# Altium PCB PCB1.PcbDoc
Units mil, origin at the board's own origin, x right, y up, seen from the top; angles counter-clockwise.
Board outline 4645 x 4275 mil, 2 copper layers (Top Layer, Bottom Layer); 58 components, 80 nets, 257 pads, 125 vias.
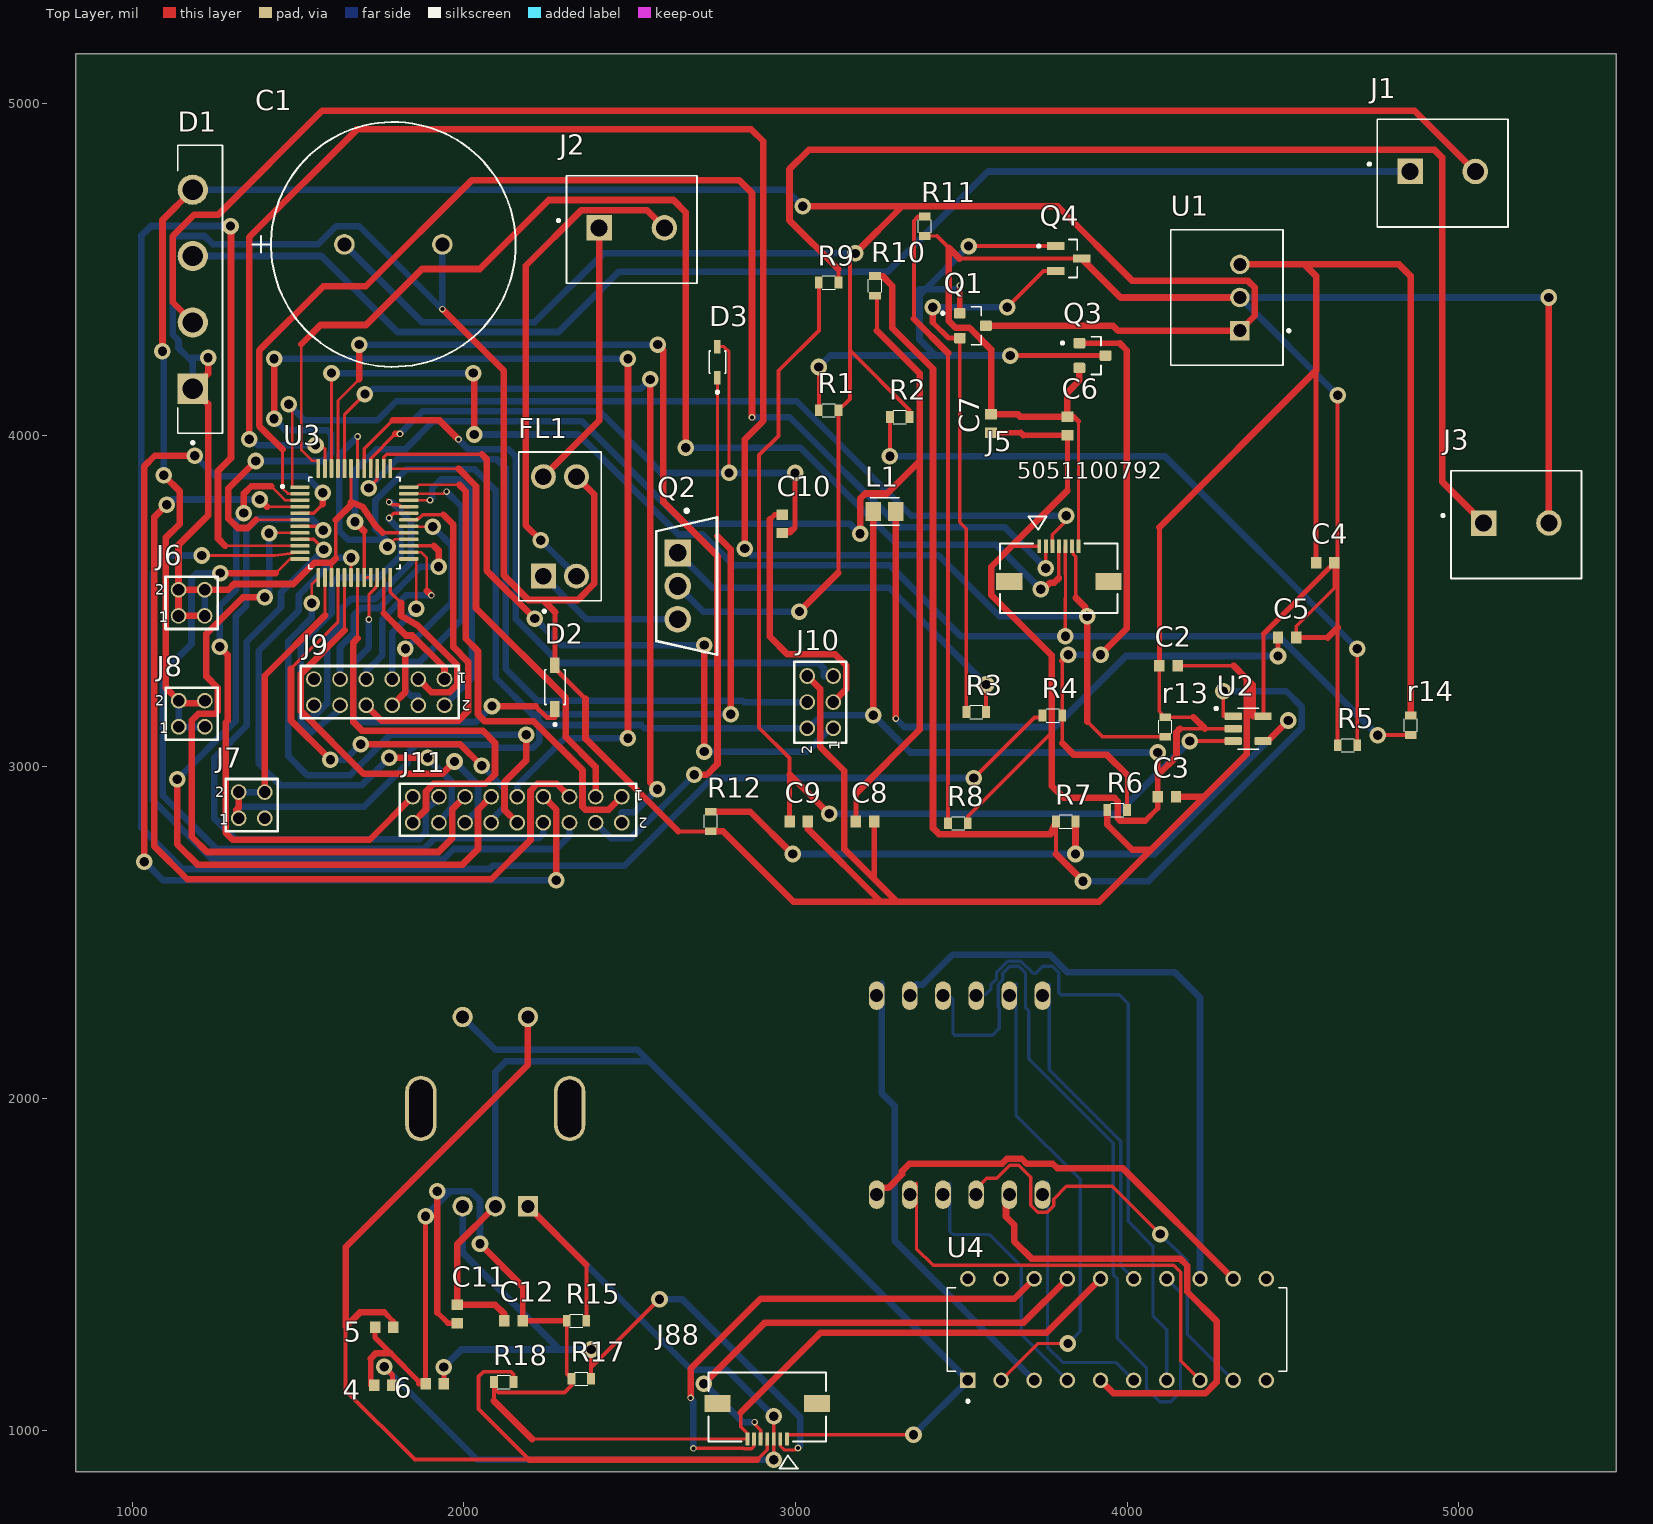
[diagram p0: Top Layer view]
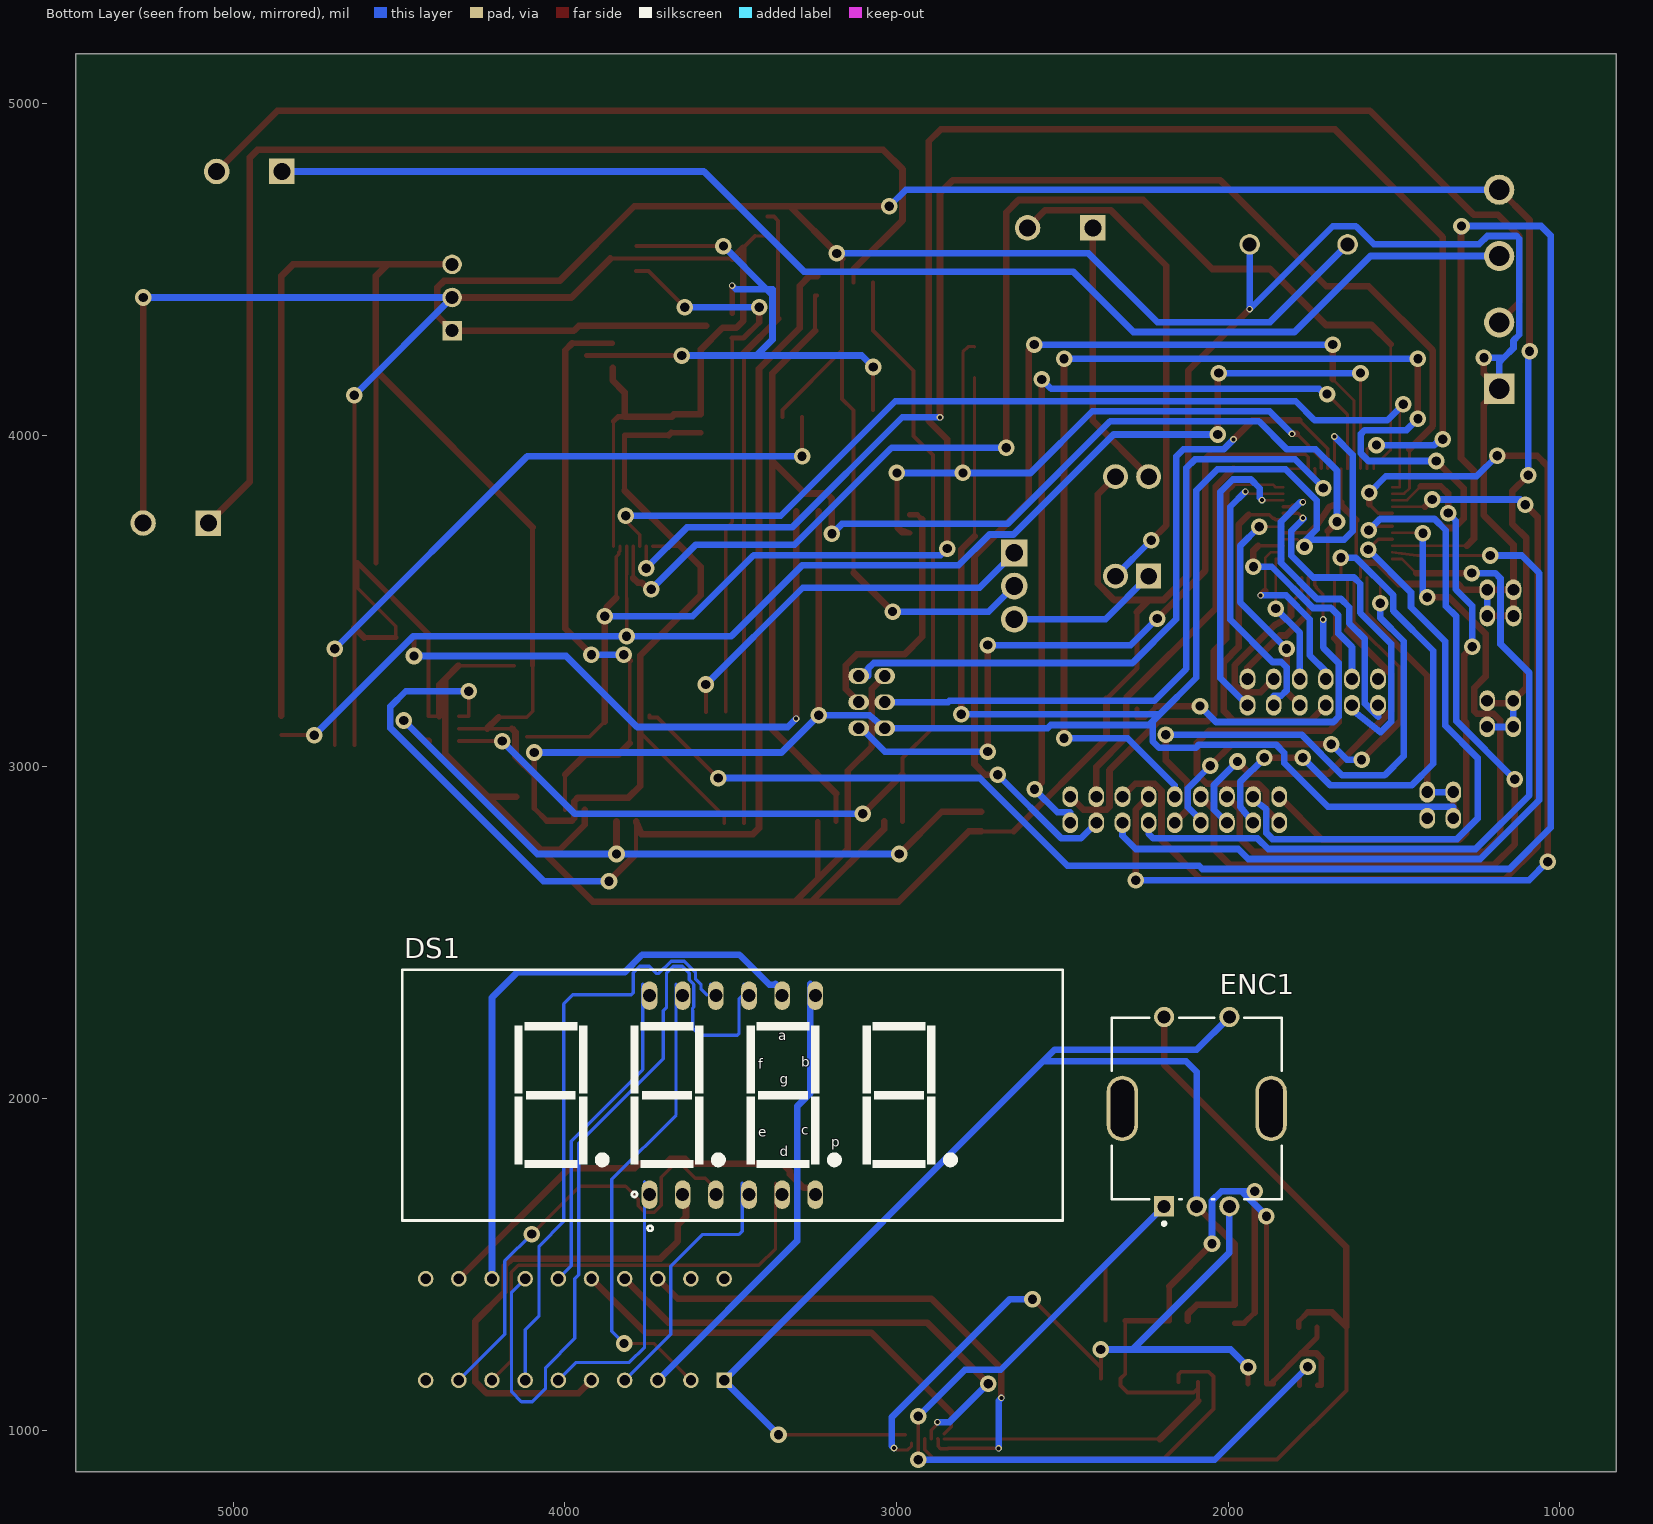
[diagram p1: Bottom Layer view, seen from below]

## Layer stack, top to bottom
Top Solder: solder mask 0.4, Solder Resist, Dk 3.5
Top Layer: signal copper 1.4
Dielectric 1: dielectric 12.6, FR-4, Dk 4.8
Bottom Layer: signal copper 1.4
Bottom Solder: solder mask 0.4, Solder Resist, Dk 3.5

## Board outline
830,875 5475,875 5475,5150 830,5150

## Design rules (kind name [scope] priority, off if disabled: settings)
Clearance [All] p1: gap=5 ignorepadtopadclearanceinfootprint=FALSE
Height [All] p1: minheight=0 maxheight=10000 prefheight=500
HoleSize [All] p1: absolutevalues=TRUE maxlimit=1000 minlimit=1 maxpercent=80.000 minpercent=20.000
MinimumSolderMaskSliver [All] p1: minsoldermaskwidth=0
PolygonConnect [All] p1: connectstyle=Relief reliefconductorwidth=10 reliefentries=4 polygonreliefangle="90 Angle" airgapwidth=10
RoutingVias [All] p1: holewidth=28 width=50 viastyle="Through Hole" minholewidth=28 minwidth=50 maxholewidth=28 maxwidth=50
SMDNeckDown [All] p1: percent=100.000
SilkToSilkClearance [All] p1: silktosilkclearance=0
SilkToSolderMaskClearance [IsPad] p1: minsilkscreentomaskgap=0 clearancetoexposedcopper=TRUE
SolderMaskExpansion [All] p1: expansion=4 istentingtop=FALSE
Width [All] p1: maxlimit=25 minlimit=8 preferedwidth=20 minimp=50.000000 maximp=50.000000 favimp=50.000000
25 further rules are at their usual default settings.

## Classes and differential pairs
component class soldererboutdisplay: 4 5 6 C11 C12 DS1 ENC1 J88 R15 R17 R18 U4
component class soldeerboutmainbody2: C10 D3 J2 J3 J5 J6 J7 J8 J9 J10 J11 r13 r14
component class soldeerboutmainbody1: C1 C2 C3 C4 C5 C6 C7 C8 C9 D1 D2 FL1 J1 L1 Q1 Q2 Q3 Q4 R1 R2 R3 R4 R5 R6 R7 R8 R9 R10 R11 R12 U1 U2 U3

## Components (designator, comment, footprint, x,y, rotation, side; value= is the part's Value field where it differs from the comment)
4 "10N" "C 0603 / 1608" 1757.44,1135 r180 top
5 "10N" "C 0603 / 1608" 1760,1310 r180 top
6 "10N" "C 0603 / 1608" 1912.44,1140 r180 top
C1 "50PK4700MEFC18X40" CAP_PKPZ_18X40_RUB 1640,4575 r0 top
C2 "100n" "C 0603 / 1608" 4125,3305 r0 top
C3 "10u" "C 0603 / 1608" 4120,2910 r0 top
C4 "100N" "C 0603 / 1608" 4597.56,3615 r0 top
C5 "100N" "C 0603 / 1608" 4482.56,3390 r0 top
C6 "D805" "C 0603 / 1608" 3820,4027.56 r90 top
C7 "10U" "C 0603 / 1608" 3590,4035 r90 top
C8 "10N" "C 0603 / 1608" 3210,2835 r0 top
C9 "10N" "C 0603 / 1608" 3010,2835 r0 top
C10 "100n" "C 0603 / 1608" 2960,3732.56 r90 top
C11 "10u" "C 0603 / 1608" 1980,1350 r90 top
C12 "100n" "C 0603 / 1608" 2150,1330 r180 top
D1 "GBU1003" SIP343W114P508L2205H2134Q4 1205,4440 r90 top
D2 "5v1" SOD3715X135N 2275,3240 r90 top
D3 "1N4148WX-TP" SOD2512X115N 2765,4220 r90 top
DS1 "7SEG_4DIGIT_CC" 7SEGX4_12 3495,2010 r180 bottom
ENC1 "PEC11R-4215K-S0024" FP-PEC11R-4215K-S0024-MFG 2095,1970 r180 bottom
FL1 "CM2545X171B-10" XFMR_CM2545X171B-10 2290,3725 r90 top
J1 "1935161" PHOENIX_1935161 4825,4895 r0 top
J2 "1935161" PHOENIX_1935161 2380,4725 r0 top
J3 "1935161" PHOENIX_1935161 5046.85,3835 r0 top
J5 "5051100792" CON_5051100792_MOL 3794.37,3568.54 r0 top
J6 "GND" HDR2_M_2X2 1179.37,3494.37 r0 top value=HDRM_2X2
J7 "5V" HDR2_M_2X2 1360.63,2884.37 r0 top value=HDRM_2X2
J8 "24V" HDR2_M_2X2 1180,3160 r0 top value=HDRM_2X2
J9 "GPIO2" HDR2_M_2X6 1745,3225 r180 top value=HDRM_2X6
J10 "HDRM_2X3" HDR2_M_2X3 3075,3195 r90 top
J11 "GPIO1" HDR2_M_2X9 2121.89,2870.63 r180 top value=HDRM_2X9
J88 "5051100792" CON_5051100792_MOL 2915,1070 r180 top
L1 "10U" INDC2012X145N 3268.86,3770 r0 top
Q1 "BC847B" TRANS_BC847B 3535,4330 r0 top
Q2 "IRF9530PBF" FP-X15-0364-MFG 2671.97,3545 r0 top
Q3 "BC847B" TRANS_BC847B 3895.63,4240 r0 top
Q4 "BC857B" SOT95P240X120-3N 3823.98,4532.6 r0 top
R1 "4K7" "R 0603" 3100,4075 r0 top
R2 "68k" "R 0603" 3314.53,4055 r0 top
R3 "100" "R 0603" 3545,3165 r0 top
R4 "10K" "R 0603" 3775,3155 r0 top
R5 "10k" "R 0603" 4664.53,3065 r0 top
R6 "4k7" "R 0603" 3970,2870 r0 top
R7 "18k" "R 0603" 3815,2835 r0 top
R8 "1M" "R 0603" 3490,2830 r0 top
R9 "5K6" "R 0603" 3100,4460 r0 top
R10 "5k6" "R 0603" 3240,4450 r90 top
R11 "10M" "R 0603" 3390,4630 r90 top
R12 "100" "R 0603" 2745,2835 r90 top
r13 "4k7" "R 0603" 4115,3120 r90 top (schematic designator R13)
r14 "4k7" "R 0603" 4855,3125 r90 top (schematic designator R14)
R15 "10k" "R 0603" 2340,1330 r180 top
R17 "10K" "R 0603" 2354.53,1155 r180 top
R18 "10k" "R 0603" 2120.47,1145 r180 top
U1 "OKI-78SR-5/1.5-W36-C" CONV_OKI-78SR-5/1.5-W36-C 4340,4415 r90 top
U2 "MCP6001RT-I/OT" SOT95P280X145-5N 4365,3115 r0 top
U3 "ATMEGA4809-AFR" QFP50P900X900X120-48N 1670,3735 r0 top
U4 "TM1637" DIP778W43P254L2612H431Q20N 3970,1303.15 r90 top

## Footprints (in the part's own frame and the unit in brackets; to place one, negate y for a bottom-side part, rotate by r counter-clockwise, add the part's x,y. Pads: shape width x height; smd on the part's side, far side on the other; paste and mask are expansions set on the pad)
7SEGX4_12 [mm] "7SEG 4DIGIT 12pin Pitch: 2.54mm    5641 0.56\", 19X50.3mm"
  oval 1.2x2.2 hole 1: 1(-6.35,-7.62) 2(-3.81,-7.62) 3(-1.27,-7.62) 4(1.27,-7.62) 5(3.81,-7.62) 6(6.35,-7.62) 7(6.35,7.62) 8(3.81,7.62) 9(1.27,7.62) 10(-1.27,7.62) 11(-3.81,7.62) 12(-6.35,7.62)
  silkscreen extent -25.3,-10.4 25.3,9.6, body extent -25.2,-9.5 25.2,9.5, height 8
"C 0603 / 1608" [mm] "Capacitor 0603 / 1608 (1.6 x 0.8 mm)"
  rect 0.8x0.9 smd: 1(-0.7,0) 2(0.7,0)
  body extent -0.8,-0.4 0.8,0.4, height 0.3
CAP_PKPZ_18X40_RUB [mil]
  round 62 / inner round 60 / far side round 62 hole 42 paste-99999 mask+0: 1(0,0) 2(295.28,0)
  silkscreen extent -276,-369 517,369, body extent -216,-364 512,364, height 1655
CON_5051100792_MOL [mm]
  rect 0.3x1 smd paste+0 mask+0.025: 1(-1.5,2.45) 2(-1,2.45) 3(-0.5,2.45) 4(0,2.45) 5(0.5,2.45) 6(1,2.45) 7(1.5,2.45)
  rect 2x1.3 smd paste+0 mask+0.025: P1(-3.8,-0.25) P2(3.8,-0.25)
  silkscreen extent -4.5,-2.65 4.5,4.74
CONV_OKI-78SR-5/1.5-W36-C [mm]
  rect 1.5x1.5 hole 1: 1(-2.54,0)
  round 1.5 hole 1: 2(0,0) 3(2.54,0)
  silkscreen extent -5.2,-3.85 5.2,5.3, body extent -5.21,-3.3 5.21,5.33, height 16.51
DIP778W43P254L2612H431Q20N [mm]
  rect 1.19x1.19 hole 0.79: 1(-3.89,11.43)
  round 1.19 hole 0.79: 2(-3.89,8.89) 3(-3.89,6.35) 4(-3.89,3.81) 5(-3.89,1.27) 6(-3.89,-1.27) 7(-3.89,-3.81) 8(-3.89,-6.35) 9(-3.89,-8.89) 10(-3.89,-11.43) 11(3.89,-11.43) 12(3.89,-8.89) 13(3.89,-6.35) 14(3.89,-3.81) 15(3.89,-1.27) 16(3.89,1.27) 17(3.89,3.81) 18(3.89,6.35) 19(3.89,8.89) 20(3.89,11.43)
  silkscreen extent -5.58,-13 3.2,13, body extent -4.03,-13 4.03,13, height 4.31
FP-PEC11R-4215K-S0024-MFG [mm]
  round 1.55 hole 1 paste-2539.97 mask+0: 1(-2.5,7) 2(2.5,7) B(2.5,-7.5) C(0,-7.5)
  rrect100% 2.4x5 hole 4.4 slot 1.8 at 0 deg paste-2539.97 mask+0: 3(-5.7,0) 4(5.7,0)
  rect 1.55x1.55 hole 1 paste-2539.97 mask+0: A(-2.5,-7.5)
  silkscreen extent -6.5,-8.95 6.5,6.95, body extent -7,-7.7 7,7.2, height 22.3
FP-X15-0364-MFG [mm]
  rect 2.05x2.05 hole 1.35 paste-2539.97 mask+0: 1(-0.685,2.54)
  round 2.05 hole 1.35 paste-2539.97 mask+0: 2(-0.685,0) 3(-0.685,-2.54)
  silkscreen extent -2.32,-5.26 2.33,5.88, body extent -2.42,-5.36 2.42,5.36, height 0.25
HDR2_M_2X2 [mm] "Connector; Header; 2mm Pitch"
  round 1.2 / inner round 1.2 / far side oval 1.2x1.6 hole 0.9: 1(-1,-1) 2(-1,1) 3(1,-1) 4(1,1)
  silkscreen extent -2,-2 2,2, body extent -1.95,-2 1.95,2, height 6
HDR2_M_2X3 [mm] "Connector; Header; 2mm Pitch"
  round 1.2 / inner round 1.2 / far side oval 1.2x1.6 hole 0.9: 1(-2,-1) 2(-2,1) 3(0,-1) 4(0,1) 5(2,-1) 6(2,1)
  silkscreen extent -3.1,-2 3.1,2, body extent -2.95,-2 2.95,2, height 6
HDR2_M_2X6 [mm] "Connector; Header; 2mm Pitch"
  round 1.2 / inner round 1.2 / far side oval 1.2x1.6 hole 0.9: 1(-5,-1) 2(-5,1) 3(-3,-1) 4(-3,1) 5(-1,-1) 6(-1,1) 7(1,-1) 8(1,1) 9(3,-1) 10(3,1) 11(5,-1) 12(5,1)
  silkscreen extent -6.1,-2 6,2, body extent -5.95,-2 5.95,2, height 6
HDR2_M_2X9 [mm] "Connector; Header; 2mm Pitch"
  round 1.2 / inner round 1.2 / far side oval 1.2x1.6 hole 0.9: 1(-9,-1) 2(-9,1) 3(-7,-1) 4(-7,1) 5(-5,-1) 6(-5,1) 7(-3,-1) 8(-3,1) 9(-1,-1) 10(-1,1) 11(1,-1) 12(1,1) 13(3,-1) 14(3,1) 15(5,-1) 16(5,1) 17(7,-1) 18(7,1)
  silkscreen extent -10.1,-2 8,2, body extent -9.95,-2 7.95,2, height 6
INDC2012X145N [mm]
  rect 1.2x1.47 smd: 1(-0.86,0) 2(0.86,0)
  silkscreen extent -1.1,-1.06 1.1,1.06, body extent -1,-0.63 1,0.63, height 1.45
PHOENIX_1935161 [mm]
  rect 1.95x1.95 hole 1.3: 1(0.715,-2.54)
  round 1.95 hole 1.3: 2(5.715,-2.54)
  silkscreen extent -2.5,-6.79 8.22,1.46, body extent -1.99,-7.12 8.41,1.88, height 5.7
QFP50P900X900X120-48N [mm]
  rrect50% 1.47x0.28 smd: 1(-4.17,2.75) 2(-4.17,2.25) 3(-4.17,1.75) 4(-4.17,1.25) 5(-4.17,0.75) 6(-4.17,0.25) 7(-4.17,-0.25) 8(-4.17,-0.75) 9(-4.17,-1.25) 10(-4.17,-1.75) 11(-4.17,-2.25) 12(-4.17,-2.75) 25(4.17,-2.75) 26(4.17,-2.25) 27(4.17,-1.75) 28(4.17,-1.25) 29(4.17,-0.75) 30(4.17,-0.25) 31(4.17,0.25) 32(4.17,0.75) 33(4.17,1.25) 34(4.17,1.75) 35(4.17,2.25) 36(4.17,2.75)
  rrect50% 0.28x1.47 smd: 13(-2.75,-4.17) 14(-2.25,-4.17) 15(-1.75,-4.17) 16(-1.25,-4.17) 17(-0.75,-4.17) 18(-0.25,-4.17) 19(0.25,-4.17) 20(0.75,-4.17) 21(1.25,-4.17) 22(1.75,-4.17) 23(2.25,-4.17) 24(2.75,-4.17) 37(2.75,4.17) 38(2.25,4.17) 39(1.75,4.17) 40(1.25,4.17) 41(0.75,4.17) 42(0.25,4.17) 43(-0.25,4.17) 44(-0.75,4.17) 45(-1.25,4.17) 46(-1.75,4.17) 47(-2.25,4.17) 48(-2.75,4.17)
  silkscreen extent -5.6,-3.5 3.5,3.5, body extent -4.5,-4.5 4.5,4.5, height 1.2
"R 0603" [mm]
  rect 0.6x0.9 smd mask+0.01: 1(-0.75,0) 2(0.75,0)
  silkscreen extent -0.48,-0.51 0.51,0.51, body extent -0.82,-0.4 0.88,0.4, height 0.56
SIP343W114P508L2205H2134Q4 [mm]
  round 2.31 hole 1.54: AC1(-2.54,0.56) AC2(2.54,0.56) NEG(7.62,0.56)
  rect 2.31x2.31 hole 1.54: POS(-7.62,0.56)
  silkscreen extent -11.86,-1.71 11.03,1.72, body extent -11.02,-1.72 11.02,1.72, height 21.34
SOD2512X115N [mm]
  rect 1.05x0.5 smd: A(1.185,0) C(-1.185,0)
  silkscreen extent -2.4,-0.62 0.85,0.62
SOD3715X135N [mm]
  rect 1.21x0.73 smd: A(1.68,0) K(-1.68,0)
  silkscreen extent -2.95,-0.78 1.33,0.78, body extent -1.83,-0.77 1.83,0.77, height 0.74
SOT95P240X120-3N [mm]
  rect 1.34x0.6 smd: 1(-0.99,0.95) 2(-0.98,-0.95) 3(0.99,0)
  silkscreen extent -2.39,-1.45 0.65,1.45, body extent 0,-1.2 3.04,0.1, height 2
SOT95P280X145-5N [mm]
  rrect25% 1.32x0.59 smd: 1(-1.145,0.95) 2(-1.145,0) 3(-1.145,-0.95) 4(1.145,-0.95) 5(1.145,0.95)
  silkscreen extent -2.54,-1.56 0.8,1.64, body extent -1.45,-1.35 1.45,1.35, height 1.45
TRANS_BC847B [mm]
  rrect25% 0.9x0.8 smd: 1(-1,0.95) 2(-1,-0.95) 3(1,0)
  silkscreen extent -2.4,-1.45 0.65,1.45, body extent -1.25,-1.45 1.25,1.45, height 1.1
XFMR_CM2545X171B-10 [mil]
  rect 75x75 hole 50: 1(-150,50)
  round 75 hole 50: 2(-150,-50) 3(150,-50) 4(150,50)
  silkscreen extent -260,-124 224,124, body extent -224,-124 224,124, height 374

## Part data
4 5 6 C2 C3 C4 C5 C6 C7 C8 C9 C10 C11 C12: library part Capacitor
C1: "No Description Available", Mfr_Name=Rubycon
D1 D3 FL1 J1 J2 J3 Q4: Package=None, Availability=Unavailable, Price=None
  D1: MF="{'manufacturer': u'Taiwan Semiconductor'}", MP=GBU1003
  D3: MF="{'manufacturer': u'Micro Commercial'}", MP=1N4148WX-TP
  FL1: MF="{'manufacturer': u'Laird'}", MP=CM2545X171B-10
  J1 J2 J3: MF="{'manufacturer': u'Phoenix Contact'}", MP=1935161
  Q4: MF="{'manufacturer': u'Diotec'}", MP=BC857B
D2: library part MMSZ5231B-7-F, Package=None, Availability=Unavailable, MF="{'manufacturer': u'Diodes Inc.'}", MP=MMSZ5231B-7-F, Price=None
DS1: "7SEGMENT, 4DIGIT, common cathode 5641", MANF_P#=DPY-4CK
ENC1: library part pec11r425fs0024, "ROTARY ENCODER MECHANICAL 24PPR", Max Operating Temperature=70°C, Max Supply Voltage (DC)=5V, Min Operating Temperature=-30°C, Package Quantity=150, Built in Switch=Yes, Detent=Yes, Encoder Type=Mechanical, Height=13.4mm, Hole Diameter=1.8mm, Length=21.5mm, Mount="Through Hole", Number of Channels=2, Orientation=Vertical, Output Type=Quadrature, Packaging=Bulk, Pulses per Revolution=24, REACH SVHC="No SVHC", RoHS Compliant=Yes, Series=PEC11R, Termination="PC Pin", Width=12.5mm
J5 J88: "No Description Available", Mfr_Name="Molex Connector Corporation", RefDes=RefDes, Type=Type
J6 J7 J8: library part HDRRS_M_2X2, "CONN, HEADER, Male, pitch: 2.54mm, 4POS", MANF=MANF, MANF_P#=MANF_PART#
J9: library part HDRRS_M_2X6, "CONN, HEADER, Male, pitch: 2.54mm, 12POS"
J10: library part HDRRS_M_2X3, "CONN, HEADER, Male, pitch: 2.54mm, 6POS", MANF=MANF, MANF_P#=MANF_PART#
J11: library part HDRRS_M_2X9, "CONN, HEADER, Male, pitch: 2.54mm, 18POS"
L1: library part MLZ2012N100LT000, "Inductor Power Shielded Multi-Layer 10uH 20% 2MHz Ferrite 500mA 390mOhm DCR 0805 T/R", Package=None, Availability=Unavailable, MF="{'manufacturer': u'TDK'}", MP=MLZ2012N100LT000, Price=None
Q1 Q3: "<a href=\"https://pricing.snapeda.com/parts/BC847B/Diotec%20Semiconductor/view-part?ref=eda\">Check availability</a>", Package=None, Availability=Unavailable, MF="{'manufacturer': u'STMicroelectronics'}", MP=BC847B, Price=None
Q2: library part CMP-02550-000233-1, "MOSFET P-CH 100V 12A TO-220AB", Case/Package=TO-220AB, Continuous Drain Current (ID)=12A, Current Rating=-12A, Drain to Source Breakdown Voltage=-100V, Drain to Source Resistance=300mR, Drain to Source Voltage (Vdss)=100V, Gate to Source Voltage (Vgs)=20V, Input Capacitance=860pF, Max Operating Temperature=175°C, Max Power Dissipation=88W, Min Operating Temperature=-55°C, Package Quantity=50, Threshold Voltage=-4V, Drain-source On Resistance-Max=300mR, Element Configuration=Single, Fall Time=39ns, Height=9.01mm, Lead Free="Lead Free", Length=10.41mm, Mount="Through Hole", Number of Channels=1, Number of Elements=1, Number of Pins=3, On-State Resistance=300mR, Packaging=Rail/Tube, Polarity=P-CHANNEL, Polarization=P, Power Dissipation=88W, Radiation Hardening=No, Rds On Max=300mR, Recovery Time=240ns, Rise Time=52ns, RoHS Compliant=Yes, Series=-, Turn-Off Delay Time=31ns, Turn-On Delay Time=12ns, Voltage Rating (DC)=-100V, Weight=0.211644oz, Width=4.7mm
R1 R2 R3 R4 R5 R6 R7 R8 R9 R10 R11 R12 r13 r14 R15 R17 R18: library part Resistor
U1: "OKI Series 8 W Single Output 5 V Non Isolated Through Hole DC/DC Converter", Package=None, Availability=Unavailable, MF="{'manufacturer': u'Murata Power Solutions'}", MP=OKI-78SR-5/1.5-W36-C, Price=None
U2: "General Purpose Amplifier 1 Circuit Rail-to-Rail SOT-23-5", Package=None, Availability=Unavailable, MF="{'manufacturer': u'Microchip Technology'}", MP=MCP6001RT-I/OT, Price=None
U3: "20MHz 48KB TQFP48 Ind 125C Green T&R", Package=None, Availability=Unavailable, MF="{'manufacturer': u'Microchip'}", MP=ATMEGA4809-AFR, Price=None
U4: "LED Drive Control Special Circuit", Package=Package, Availability="Not in stock", Check_prices=https://www.snapeda.com/parts/TM1637/Titan+Micro+Electronics/view-part/?ref=eda, MF="Titan Micro Electronics", MP=TM1637, Price=None, SnapEDA_Link=https://www.snapeda.com/parts/TM1637/Titan+Micro+Electronics/view-part/?ref=snap

## Via types
v1: diameter 50, hole 28, Top Layer to Bottom Layer, 108 vias
v2: diameter 20, hole 12, Top Layer to Bottom Layer, 17 vias

## Nets (pads, with @x,y where several pads share a name; then routed paths per layer and width w, separated by ;. In a path a pad name is that pad's centre, name@x,y a point inside that pad or via, vN(x,y) a via of type N, cw(c..) or ccw(c..) an arc to the next point about the centre after c; other vN are vias at no path point)
5V: C2.1 C3.1 C4.1 C6.1 C7.1 D3.C J5.1 J7.1 J7.2 J7.3 J7.4 J10.2 L1.1 R8.2 r13.2 r14.2 U1.3 U2.2 U3.14 U3.28 U3.42 | length 15142.1
  Top Layer w8: 1581.42,3456 U3.14 ; v1(1770,3664) 1791.79,3685.79 U3.28
  Top Layer w9.84: 2765,3695 D3.C
  Top Layer w10: U3.42 v2(1679.84,3995.84) ; 3652,3665 J5.1 ; C2.1 4097.44,3167.09 r13.2 4200,3149.53 ; 4160,3115 4234.53,3115 U2.2
  Top Layer w11.81: R8.2 3519.53,2850 3773,3103.47
  Top Layer w15.75: C7.1 3679.56,4007.44 ; 3687,4000 C6.1 3820,3833 ; 4054.44,2837 4092.44,2875 C3.1 4092.44,2974.44 v1(4092.44,3043) ; C2.1 4097.44,3722.44 ; C4.1 4570,4195
  Top Layer w20: J7.1 1314.36,2851.9 1314.36,2870.26 1321.26,2877.16 J7.2 ; J7.4 1400,3274.58 1581.42,3456 ; 2765,3695 2805,3655 v1(2805,3158) ; v1(3235,3155) L1.1 ; 3679.56,4007.44 3687,4000 ; 3820,3833 3652,3665 3590.39,3603.39 3590.39,3518.11 3773,3335.5 3773,3103.47 3773,2942 3808,2907 3961,2907 3972,2896 3972,2845 3980,2837 4054.44,2837 ; 4092.44,2974.44 4149,3031 4149,3104 4160,3115 ; 4097.44,3722.44 4570,4195 4570,4480 4535,4515 ; 4200,3149.53 4234.53,3115 ; U1.3 4535,4515 ; r14.2 4855,4480 4820,4515 4535,4515
  Bottom Layer w20: J7.1 1321.26,2880 1400,2880 ; J7.2 J7.4 ; J7.3 1400,2880 ; v2@1680,3996 1625,3941 1625,3710 1650,3685 1755,3685 ; v1(1770,3664) 1764.26,3669.74 1764.26,3685.74 1733,3717 1733,3803 1827,3897 2032.85,3897 2096.5,3833.35 2096.5,3268.5 2207,3158 ; v1(2805,3158) 2207,3158 ; v1(4092.44,3043) 3347,3043 v1(3235,3155) 3081.5,3155 J10.2 2544.74,3116.26 2535,3126 2239,3126 2228,3137 ; 1400,2880 1700,2880 1831,3011 1831,3042 1856,3067 2088,3067 2098,3057 2208,3057 2228,3077 2228,3137 ; 2207,3158 2228,3137
24V: C1.1 D1.NEG J8.1 J8.2 J8.3 J8.4 Q1.3 Q2.2 R1.2 R2.2 U1.1 | length 9870.4
  Top Layer w11.81: 3129.53,3585.53 R1.2 3164,4109.47 3164,4256 ; v1@3164,4532 3164,4256 ; R2.2 3344.06,4075.94 3164,4256
  Top Layer w20: v1(1091.45,4253.07) 1091.45,4648.5 D1.NEG ; v1(1095,3879) 1144,3830 1144,3733 1101,3690 1101,3239 J8.2 1147.93,3192.07 1212.07,3192.07 J8.4 ; v1(3012,3468) 3129.53,3585.53 ; v1(3022,4690) 3322,4690 ; v1@3164,4532 v1(3180,4548) 3322,4690 ; Q1.3 3958,4330 3973,4315 U1.1 4385,4360 4385,4445 4365,4465 4016,4465 3791,4690 3322,4690
  Bottom Layer w20: v1(1091.45,4253.07) 1095,4249.53 v1(1095,3879) ; J8.2 J8.1 1140.63,3120 1219.37,3120 J8.3 ; D1.NEG 2972,4740 v1(3022,4690) ; C1.1 1874.08,4340.92 2213.92,4340.92 2421,4548 v1(3180,4548) ; Q2.2 2722,3468 v1(3012,3468)
GND: C1.2 C2.2 C3.2 C4.2 C5.2 C6.2 C7.2 C8.2 C9.2 D1.POS D2.A FL1.3 J3.2 J5.7 J6.1 J6.2 J6.3 J6.4 J10.6 Q3.2 Q4.3 R5.1 R6.1 R11.1 R12.1 U1.2 U2.5 U3.15 U3.29 U3.43 | length 16811.4
  Top Layer w8: 1660.16,3798 U3.43
  Top Layer w10: U3.15 1601.1,3607 ; 1614,3628 1614,3744 ; 1755.53,3705.47 U3.29 ; R11.1 3427,4600.47 ; J5.7 3853.43,4041.69 ; C2.2 4321,3305 ; C5.2 4510.12,3424 4625.12,3539 C4.2
  Top Layer w11.61: 4378.4,3152.4 U2.5 4411,3152.4 4411,3400.88
  Top Layer w11.81: 2646.53,2805.47 R12.1 ; 3427,4600.47 3462,4565.47 ; 3494.87,4532.6 Q4.3 ; R5.1 4635,3420 4635,3615 v1(4635,4120)
  Top Layer w14.37: 2275,3466.48 D2.A 2275,3297 2367,3205
  Top Layer w15.75: 3237.56,2661.44 C8.2 ; C6.2 3840,4055.12 3853.43,4041.69 ; 4411,3400.88 C4.2 ; C5.2 4605,3390
  Top Layer w20: J6.3 J6.1 J6.2 ; v1(1229,4233.48) 1229,4186.05 D1.POS 1229,4093.95 1229,3758 1140,3669 J6.2 ; 1614,3628 1601,3615 1550,3615 1486,3551 1307,3551 1289.74,3533.74 J6.4 J6.2 ; 1614,3744 1664.08,3794.08 1660.16,3798 1696,3783 1733,3728 1755.53,3705.47 ; v2@1938,4377 2121,4194 2121,3577 2195,3503 2238.48,3503 ; 2275,3466.48 2238.48,3503 ; FL1.3 2393,3822 2393,3552 2344,3503 2238.48,3503 ; 2367,3205 2367,3085 2646.53,2805.47 ; R12.1 2781.53,2805.47 2994,2593 3257.06,2593 ; J10.6 3075,3234.37 3075,3060 3147,2988 3147,2752 3237.56,2661.44 3306,2593 ; C9.2 3037.56,2812.5 3257.06,2593 ; 3494.87,4532.6 3462,4565.47 3462,4345 3483,4324 3524.5,4324 3590,4258.5 C7.2 3671,4062.56 3678.44,4055.12 C6.2 3820,4129 3856.26,4165.26 Q3.2 ; Q4.3 3980.55,4415 U1.2 ; R6.1 3940.47,2825 4015.47,2750 4072.56,2750 ; C3.2 4232.56,2910 ; 4321,3305 4361,3265 ; 4378.4,3152.4 4378.4,3247.6 4361,3265 ; 4605,3390 4635,3420 ; J3.2 v1(5271.85,4415) ; 3257.06,2593 3306,2593 ; 3306,2593 3915.56,2593 4072.56,2750 ; 4072.56,2750 4232.56,2910 ; 4232.56,2910 4361,3038.44 4361,3265
  Bottom Layer w20: D1.POS 1182.95,4219.53 1169,4233.48 ; J6.3 J6.4 ; v1(1229,4233.48) 1169,4233.48 ; C1.2 v2(1935.28,4379.72) 1685,4630 1615,4630 1561,4576 1243,4576 1218.53,4600.47 1130.95,4600.47 1122.48,4592 1122.48,4302.52 1140,4285 1140,4262.48 1169,4233.48 ; v1(4635,4120) U1.2 v1(5271.85,4415)
GND2: C11.2 C12.2 ENC1.2 ENC1.C J88.1 U4.1 | length 3991.3
  Top Layer w10: J88.1@2974.06,986 v1(3356,986)
  Top Layer w20: ENC1.C 1980,1559.72 C11.2 2094.88,1377.56 2122.44,1350 C12.2
  Bottom Layer w20: ENC1.2 2095,2147.16 2522.84,2147.16 2558,2112 ; ENC1.C 2095,2080 2127,2112 2558,2112 ; v1(3356,986) U4.1 2558,2112
Net4_1: 4.1 ENC1.A J88.3 R15.1 | length 2909.4
  Top Layer w10: v1(2934.69,910.45) J88.3 v1(2934.69,1041.31)
  Top Layer w11.81: R15.1 2369.53,1498.62
  Top Layer w15.75: v1(1760,1191) 1785,1166 4.1
  Top Layer w20: ENC1.A 2369.53,1498.62
  Bottom Layer w20: v1(1760,1191) 2040.55,910.45 v1(2934.69,910.45) ; ENC1.A 2686.02,1182.13 2793.87,1182.13 v1(2934.69,1041.31)
Net5_1: 5.1 ENC1.1 J88.4 R18.1 | length 3396.8
  Top Layer w10: 2885,911 2915,941 J88.4
  Top Layer w11.81: 1644,1312 1644,1120 1853,911 2197,911 2045,1063 2045,1161 2060,1176 2142,1176 2150,1168 R18.1
  Top Layer w15.75: 1760.56,1355 1787.56,1328 5.1
  Top Layer w20: 1760.56,1355 1687,1355 1644,1312 1644,1552 2193.43,2101.43 ENC1.1 ; 2197,911 2885,911
Net6_1: 6.1 ENC1.B J88.2 R17.1 | length 2184.7
  Top Layer w10: J88.2@2955,960 2955,950.9 2965.9,940 2999.29,940 3005.2,945.9 v2(3007.9,945.9)
  Top Layer w11.81: R17.1 2384.06,1188.94 ; v1(2384.06,1242.94) 2384.06,1188.94 ; v1(2590.06,1394.94) 2384.06,1188.94
  Top Layer w15.75: 6.1 v1(1940,1190)
  Bottom Layer w20: v1(1940,1190) 1992.94,1242.94 2288.63,1242.94 ; ENC1.B 1996.57,1535 2288.63,1242.94 ; v1(2384.06,1242.94) 2288.63,1242.94 ; v1(2590.06,1394.94) 2657.95,1394.94 3015,1037.9 3015,953 v2(3007.9,945.9)
NetC5_1: C5.1 L1.2 | length 1932.1
  Top Layer w15.75: v1(4455,3334) C5.1
  Top Layer w20: v2(3302.72,3145.28) L1.2
  Bottom Layer w20: v2(3302.72,3145.28) 3328,3120 3782.39,3120 3996.39,3334 v1(4455,3334)
NetC8_1: C8.1 R10.1 U3.20 U3.21 | length 4136.2
  Top Layer w8: U3.20 U3.21
  Top Layer w10: U3.20 1699.53,3711
  Top Layer w11.81: R10.1 3246,4420.47 3246,4315
  Top Layer w15.75: C8.1 3182.44,2919.44
  Top Layer w20: v1(1672,3738.53) 1699.53,3711 ; 3182.44,2919.44 3375,3112 3375,3922 ; v1(3195,3702.35) 3195,3808 3211,3824 3277,3824 3375,3922 ; 3246,4315 3375,4186 3375,3922
  Bottom Layer w20: v1(1672,3738.53) 1672,3893 1736,3957 1822.62,3957 1907.62,4042 2356,4042 2665.65,3732.35 3165,3732.35 v1(3195,3702.35)
NetC9_1: C9.1 R9.1 U2.3 | length 3215.4
  Top Layer w11.61: v1(4189.4,3077.6) U2.3
  Top Layer w11.81: 2982.44,2977.56 2982.44,3026 2890.76,3117.68 2890.76,3939.52 2949,3997.76 2949,4194.09 3070.47,4315.56 R9.1
  Top Layer w15.75: C9.1 2982.44,2977.56
  Top Layer w20: 2982.44,2977.56 v1(3102,2858)
  Bottom Layer w20: v1(3102,2858) 3969.8,2858 v1(4189.4,3077.6)
NetC10_1: C10.1 D3.A U3.40 | length 2106
  Top Layer w9.84: D3.A 2765,4267 2784,4267 2800,4251 v1(2800,3886)
  Top Layer w10: U3.40 1719.21,3929.21 1794,4004
  Top Layer w15.75: v1(2999,3886) 2999,3720 ; 2999,3720 2984,3705 C10.1 2999,3720
  Top Layer w20: 1794,4004 v2(1807.62,4004)
  Bottom Layer w20: v2(1807.62,4004) 1875.62,4072 2410,4072 2596,3886 v1(2800,3886) v1(2999,3886)
NetC10_2: C10.2 J10.3 | length 789.2
  Top Layer w15.75: 2923,3745.62 2937.5,3760.12 C10.2
  Top Layer w20: 2923,3745.62 2923,3392 2976,3339 3120,3339 3152.99,3306.01 3152.99,3233.62 J10.3
NetD1_AC1: D1.AC1 J1.2 | length 4444.9
  Top Layer w20: D1.AC1 1122.48,4400.47 1122.48,4600 1187.48,4665 1260,4665 1573,4978 4867,4978 J1.2
NetD1_AC2: D1.AC2 J1.1 | length 3965.6
  Bottom Layer w20: D1.AC2 1571,4540 1800.08,4310.92 2285.92,4310.92 2468,4493 3279,4493 3581,4795 J1.1
NetD2_K: D2.K U3.22 | length 1123.1
  Top Layer w10: v2(1714,3444.1) 1714,3518.64 1734.72,3539.36 1734.72,3543.23 1738.9,3547.4 U3.22
  Top Layer w14.37: 2216.19,3183 2250.19,3149 2275,3149 D2.K
  Top Layer w20: v1(2085,3183) 2216.19,3183
  Bottom Layer w20: v2(1714,3444.1) 1714,3360 1667,3313 1667,3151 1683,3135 2037,3135 v1(2085,3183)
NetDS1_1: DS1.1 U4.6 | length 800
  Bottom Layer w10: 3760,1748.53 3760,1250 3806,1204 3966,1204 U4.6
NetDS1_2: DS1.2 U4.5 | length 1542.5
  Top Layer w20: DS1.2 3645,1730 3654.79,1739.79 3654.79,1704.79 3635,1685 3635,1643.28 3660,1618.28 3660,1569 3712,1517 4160,1517 4181.57,1495.43 4181.57,1417 4270,1328.57 4270,1145 4236,1111 3959,1111 U4.5
NetDS1_3: DS1.3 U4.9 | length 1318
  Top Layer w10: DS1.3@3560,1731.72 3560,1742.48 3577.2,1759.68 3607.45,1759.68 3646.07,1798.31 3673.93,1798.31 3710,1762.23 3710,1677.77 3731.07,1656.69 3758.93,1656.69 3778.62,1676.39 3778.62,1696.39 3817.23,1735 3956,1735 v1(4100,1591)
  Bottom Layer w10: v1(4100,1591) 4181,1510 4181,1289 U4.9
NetDS1_4: DS1.4 U4.4 | length 806.5
  Bottom Layer w10: 3465,1745 3465,1600 3475,1590 3585,1590 3681,1494 3681,1289 U4.4
NetDS1_5: DS1.5 U4.8 | length 1373.8
  Top Layer w10: 3365,1745 3365,1547 3415,1497 4140,1497 4161.57,1475.43 4161.57,1208.43 U4.8
NetDS1_6: DS1.6 U4.12 | length 1298.6
  Top Layer w20: DS1.6@3242.26,1692.26 3242.26,1714.94 3257.59,1730.26 3280.26,1730.26 3321.38,1771.38 3321.38,1780.68 3344,1803.31 3622.79,1803.31 3637.79,1818.31 3682.21,1818.31 3697.21,1803.31 3776,1803.31 3789.3,1790 3986.3,1790 U4.12
NetDS1_7: DS1.7 U4.3 | length 1385.5
  Bottom Layer w20: DS1.7@3260,2345 3260,2310 3260,2016 3300,1976 3300,1570 U4.3
NetDS1_8: DS1.8 U4.13 | length 1794.5
  Bottom Layer w20: 3365,2345 3367.06,2342.94 3383.63,2342.94 3474,2433.31 3767.21,2433.31 3820.52,2380 4144,2380 4220,2304 U4.13
NetDS1_9: DS1.9 U4.14 | length 2458.3
  Bottom Layer w10: DS1.9@3460,2345 3460,2315.84 3475,2300.84 3475,2196.86 3480.86,2191 3595,2191 3615,2211 3615,2264.14 3615.17,2264.31 3615.17,2272.6 3611.38,2276.39 3611.38,2343.61 3625,2357.23 3625,2377.23 3646.07,2398.31 3673.93,2398.31 3693.62,2378.61 3693.62,2274.52 3704,2264.14 3704,2119 3958,1865 3958,1468 3970,1456 3970,1276.43 4058.43,1188 4058.43,1125.57 4099,1085 4131,1085 4161,1115 4161,1415.3 U4.14
NetDS1_10: DS1.10 U4.7 | length 1802.1
  Bottom Layer w10: DS1.10@3560,2345 DS1.10@3560.31,2324.56 ; 3572.66,2312.66 3589.46,2329.46 3589.46,2342.91 3606.26,2359.71 3606.26,2379.71 3639.86,2413.31 3680.14,2413.31 3716.46,2376.98 3724.75,2376.98 3746.07,2398.31 3773.93,2398.31 3793.62,2378.61 3793.62,2318.52 3799.48,2312.66 3976.34,2312.66 4004,2285 4004,1629 4078,1555 4078,1345 4120,1303 U4.7
NetDS1_11: DS1.11 U4.2 | length 1426.9
  Top Layer w10: U4.2 3731,1261 v1(3821.57,1261)
  Bottom Layer w10: 3665,2345 3665,1950 3858.43,1756.57 3858.43,1297.85 v1(3821.57,1261)
NetDS1_12: DS1.12 U4.15 | length 994.3
  Bottom Layer w10: 3765,2345 3765,2087 3981,1871 3981,1495.3 U4.15
NetFL1_1: FL1.1 Q2.3 | length 458.8
  Bottom Layer w20: FL1.1 2370,3445 Q2.3
NetFL1_2: FL1.2 J2.2 | length 1508.6
  Top Layer w20: v1(2232,3683) 2187,3728 2187,4510.62 2354.76,4678.39 2551.61,4678.39 J2.2
  Bottom Layer w20: v1(2232,3683) FL1.2
NetFL1_4: FL1.4 J2.1 | length 819.7
  Top Layer w20: FL1.4 2408.15,4043.15 J2.1
NetJ3_1: J3.1 R9.2 | length 3558.4
  Top Layer w11.81: R9.2 3129.53,4500
  Top Layer w20: 3129.53,4500 2982,4647.53 2982,4802 3040,4860 4927,4860 4950,4837 4950,3860 J3.1
NetJ5_2: J5.2 U3.2 | length 4034.2
  Top Layer w8: 1453.45,3957.55 1453.45,3839.63 1469.5,3823.58 U3.2
  Top Layer w10: v1(3755,3599) J5.2
  Top Layer w20: 1453.45,3957.55 1383,4028 1383,4254.79 1577.21,4449 1704.57,4449 2023.57,4768 2831,4768 2869.11,4729.89 v2(2869.11,4053.89)
  Bottom Layer w20: v2(2869.11,4053.89) 2983.11,4053.89 3315,3722 3632,3722 v1(3755,3599)
NetJ5_3: J5.3 U3.1 | length 2917.9
  Top Layer w8: v1@1483.32,4081.68 1483.32,3843.27 U3.1
  Top Layer w10: J5.3 3774.69,3700 v1@3817,3742.31
  Top Layer w20: v1(1472,4093) v1@1483.32,4081.68 ; v1@3817,3742.31 v1(3817,3757)
  Bottom Layer w20: v1(1472,4093) 1520.02,4044.98 1739.52,4044.98 1796.53,4102 3004,4102 3349,3757 v1(3817,3757)
NetJ5_4: J5.4 U3.48 | length 3883.6
  Top Layer w8: 1510,4274 1510,3955 1541.88,3923.12 1560.22,3923.12 1561.73,3921.61 U3.48
  Top Layer w10: 3794.37,3569.37 J5.4
  Top Layer w20: 1510,4274 1568,4332 1705,4332 1874,4501 2048,4501 2256,4709 2632,4709 2669,4672 v1(2669,3962) ; v1(3740,3535) 3748.12,3535 3768,3554.88 3779.88,3554.88 3794.37,3569.37
  Bottom Layer w20: v1(2669,3962) 3015,3962 3307,3670 3605,3670 v1(3740,3535)
NetJ5_5: J5.5 r14.1 U3.46 | length 4371.6
  Top Layer w10: U3.46 v1(1601.1,4187.1) ; v1(3814.06,3394) 3814.06,3508.86 3814.37,3509.17 3814.37,3579.59 3814.06,3579.9 J5.5
  Top Layer w11.81: v1(4755.53,3095.47) r14.1
  Top Layer w20: v1(2028.42,4187.1) 2032,4183.53 v1(2032,4002)
  Bottom Layer w20: v1(1601.1,4187.1) v1(2028.42,4187.1) ; v1(2032,4002) 2346,4002 2647.64,3700.36 2720,3700.36 2812.36,3608 3284,3608 3498,3394 v1(3814.06,3394) 4457,3394 v1(4755.53,3095.47)
NetJ5_6: J5.6 r13.1 U3.47 | length 5779.6
  Top Layer w8: v1(1552.84,3970) 1570,3970 1581.42,3958.58 U3.47
  Top Layer w10: J5.6 3833.74,3651.22 3837.52,3647.44 3837.52,3641.17 3845,3633.69 3845,3510
  Top Layer w11.81: 3880,3136 3925.53,3090.47 r13.1
  Top Layer w20: v1(1353,3987.42) 1353,4597 1678,4922 2867,4922 2903,4886 2903,4043 2847,3987 v1(2847,3658) ; 3845,3510 3874.26,3480.74 3874.26,3459.74 v1(3880,3454) 3880,3136
  Bottom Layer w20: v1(1353,3987.42) 1361.12,3987.42 1378.54,3970 v1(1552.84,3970) ; v1(2847,3658) 2867,3638 3431,3638 3615,3454 v1(3880,3454)
NetJ9_1: J9.1 U3.23 | length 393.5
  Top Layer w10: 1758.58,3462.84 U3.23
  Top Layer w20: 1758.58,3462.84 1825.42,3396 1844.37,3396 1941.85,3298.52 J9.1
NetJ9_2: J9.2 U3.34 | length 925.3
  Top Layer w8: U3.34 1858.1,3804 v2(1898,3804)
  Bottom Layer w20: v2(1898,3804) 1905,3811 1905,3840 1931.43,3866.43 1986.18,3866.43 2024,3828.61 2024,3267.78 J9.2
NetJ9_3: J9.3 U3.24 | length 557.9
  Top Layer w10: U3.24 1778.27,3527 1810.72,3494.55
  Top Layer w20: 1810.72,3494.55 1810.72,3455.28 1861,3426 1980.47,3306.53 1980.47,3248 1957.47,3225 1902.48,3225 J9.3
NetJ9_4: J9.4 U3.35 | length 895.3
  Top Layer w8: U3.35 1938.79,3823.58 1944.98,3829.77 v2(1948.23,3829.77)
  Bottom Layer w20: J9.4 1863.11,3214 1840,3214 1824,3230 1824,3300 1840,3316 1866.33,3316 1994,3443.67 1994,3784 v2(1948.23,3829.77)
NetJ9_5: J9.5 U3.25 | length 415.6
  Top Layer w8: U3.25 1857,3626.73 v1(1857,3477)
  Bottom Layer w20: J9.5 1784.37,3323.54 1784,3323.91 1784,3404 v1(1857,3477)
NetJ9_6: J9.6 U3.30 | length 709.1
  Top Layer w8: U3.30 1835.69,3723.65 v1(1906.35,3723.65)
  Top Layer w20: J9.6 1824,3225.26 v1(1824,3356)
  Bottom Layer w20: v1(1824,3356) 1964,3496 1964,3666 v1(1906.35,3723.65)
NetJ9_7: J9.7 U3.26 | length 558.5
  Top Layer w8: U3.26 1872,3646.42 1888.77,3629.65 1888.77,3530.5
  Top Layer w20: 1888.77,3530.5 v2(1902.27,3517)
  Bottom Layer w20: J9.7 1705.63,3287.66 1754,3336.03 1754,3445 1826,3517 v2(1902.27,3517)
NetJ9_8: J9.8 U3.31 | length 1072.2
  Top Layer w10: U3.31 1857.6,3744.84 1861.77,3749.02 1865.64,3749.02 1876.62,3760 1938.62,3760
  Top Layer w20: J9.8 1752.26,3139 1984,3139 2013,3168 2013,3316.43 1968.62,3360.81 1968.62,3730 1938.62,3760
NetJ9_9: J9.9 U3.27 | length 670.4
  Top Layer w10: U3.27 1909.9,3666.1
  Top Layer w20: 1909.9,3666.1 1924,3652 v1(1924,3603)
  Bottom Layer w20: J9.9 1626.89,3360.89 1667.73,3401.73 1667.73,3456 1690.35,3478.62 1744.62,3478.62 1869,3603 v1(1924,3603)
NetJ9_10: J9.10 U3.32 | length 1057.7
  Top Layer w10: v2(1775,3750) 1789.53,3764.53 U3.32
  Bottom Layer w20: J9.10 1626.89,3172 1541,3104 1509,3136 1509,3371 1601.98,3463.98 1601.98,3552 1620.59,3570.61 1743.61,3570.61 1810,3637 1810,3711 v2@1773,3748
NetJ9_12: J9.12 U3.33 | length 947.6
  Top Layer w10: v2@1771.21,3803.79 1785,3790 1801.1,3790 1802.71,3788.39 1806.57,3788.39 1810.75,3784.21 U3.33
  Bottom Layer w20: J9.12 1548.15,3151 1588,3190.85 1588,3385.53 1634.97,3432.49 1634.97,3480.93 1660,3505.97 1731.97,3505.97 1841,3615 1841,3739 1782,3798 v2(1775,3798)
NetJ10_1: J10.1 U3.38 | length 2179.4
  Top Layer w10: U3.38 1759.09,3899.69 1759.09,3934.09 1767.44,3942.44 2054.5,3942.44
  Top Layer w20: 2054.5,3942.44 2068.75,3928.19 2068.75,3592.25 v1(2214,3447) ; v1(2725,3045.8) v1(2725,3367)
  Bottom Layer w20: v1(2214,3447) 2294,3367 v1(2725,3367) ; v1(2725,3045.8) 3035.54,3045.8 3106,3116.26 J10.1
NetJ10_4: J10.4 U3.39 | length 2086.4
  Top Layer w10: v1(1713.78,3840.35) 1713.78,3842.78 1738.39,3867.39 1738.39,3898.66 U3.39
  Bottom Layer w20: v1(1713.78,3840.35) 1713.78,3842.78 1798,3927 2100.59,3927 2126.5,3901.09 2126.5,3295.35 2223.22,3198.64 2841.36,3198.64 2845,3195 J10.4
NetJ10_5: J10.5 U3.41 | length 2129.4
  Top Layer w10: U3.41 1699.53,3958.53 1785.48,4044.48
  Top Layer w20: 1785.48,4044.48 1926.64,4044.48 v2(1984,3987.12)
  Bottom Layer w20: v2(1984,3987.12) 2014.12,3957 2135.5,3957 2156.5,3936 2156.5,3445.5 2289,3313 3069,3313 3086,3296 3086,3273.74 J10.5
NetJ11_1: J11.1 U3.36 | length 1503.8
  Top Layer w8: U3.36 1857.6,3843.27 1859.11,3844.78 1859.11,3845.31 1863.8,3850 1987,3850
  Top Layer w20: 1987,3850 2006,3831 2006,3385.86 2043,3348.86 2043,3158 2064,3137 2211,3137 2358,2990 2358,2880 2367,2871 2437.22,2871 J11.1
NetJ11_2: J11.2 U3.44 | length 2541.7
  Top Layer w8: U3.44 1640.47,4062.37
  Top Layer w10: 1640.47,4062.37 v1(1702,4123.9)
  Top Layer w20: v1(2562,4168) 2562,2954 v1(2584,2932)
  Bottom Layer w20: v1(1702,4123.9) 1710.12,4123.9 1726.22,4140 2534,4140 v1(2562,4168) ; J11.2 2476.22,2863 2515,2863 v1(2584,2932)
NetJ11_3: J11.3 U3.37 | length 1366.2
  Top Layer w8: U3.37 1778.27,3899 1984,3899
  Top Layer w20: 1984,3899 2037,3846 2037,3478 2308,3207 2308,3089.09 2397.48,2999.61 J11.3
NetJ11_4: J11.4 U3.45 | length 3094
  Top Layer w8: 1620.79,4104.56 1685,4168.77
  Top Layer w10: U3.45@1620.79,3925 1620.79,4104.56
  Top Layer w20: 1685,4168.77 v1(1685,4273) ; v1(2585,4273) 2602,4256 2602,3798.36 2765,3635.36 2765,3008 2733,2976 v1(2695,2976)
  Bottom Layer w20: v1(1685,4273) v1(2585,4273) ; J11.4 2444.74,2784 2503,2784 v1(2695,2976)
NetJ11_5: J11.5 U3.4 | length 2978
  Top Layer w8: 1406.79,3784.21 U3.4
  Top Layer w20: v1(1104,3790) 1067,3753 1067,2760 1166,2661 2083,2661 2201,2779 2201,2928 2221.62,2948.62 2280.12,2948.62 J11.5 ; v1(1385,3806) 1406.79,3784.21
  Bottom Layer w20: v1(1104,3790) 1120,3806 v1(1385,3806)
NetJ11_6: J11.6 U3.11 | length 2549.1
  Top Layer w8: v1(1210,3637) 1431,3637 1476.58,3643 U3.11
  Bottom Layer w20: v1(1210,3637) 1115,3637 1062,3584 1062,2900 1240,2722 1939.65,2722 1969.65,2752 2278.74,2752 2318.74,2792 J11.6
NetJ11_7: J11.7 U3.5 | length 3437.9
  Top Layer w10: U3.5 1547.53,3764.53 1575,3792
  Top Layer w20: v1(1037,2714) 1037,3906.61 1068.39,3938 v1(1189,3938) ; 1575,3792 v1(1575,3826) ; J11.7 2279,2871 v1(2279,2658)
  Bottom Layer w20: v1(1037,2714) 1093,2658 v1(2279,2658) ; v1(1189,3938) 1251,3876 1525,3876 v1(1575,3826)
NetJ11_8: J11.8 U3.12 | length 2308.6
  Top Layer w8: 1433.27,3584 1476,3626.73 U3.12
  Top Layer w20: v1(1266,3584) 1433.27,3584
  Bottom Layer w20: v1(1266,3584) 1195,3584 1179,3568 1179,3370 1092,3283 1092,2914 1254,2752 1879.43,2752 1911.43,2784 2226,2784 2240,2798 J11.8
NetJ11_9: J11.9 U3.6 | length 3749.9
  Top Layer w8: 1373.69,3744.84 U3.6
  Top Layer w20: v1(1373,3922) 1290,3839 1290,3748.85 1318.85,3720 1348.85,3720 1373.69,3744.84 ; v1(1428,4049) v1(1428,4230) ; v1(2495,3086) v1(2495,4230)
  Bottom Layer w20: v1(1373,3922) 1577,3922 1600,3945 1600,4003.28 1588.28,4015 1462,4015 v1(1428,4049) ; v1(1428,4230) v1(2495,4230) ; J11.9 2161.26,2944 2303.26,3086 v1(2495,3086)
NetJ11_10: J11.10 U3.13 | length 1677.3
  Top Layer w8: v1(1542,3493) 1542,3551.09 U3.13
  Top Layer w20: J11.10 2122.64,2869.88 2122.64,2953.64 2188,3019 v1(2188,3097)
  Bottom Layer w20: v1(1542,3493) 1542,3449.91 1470.74,3378.65 1470.74,3032.48 1529.23,2974 1656,2974 1779,3097 v1(2188,3097)
NetJ11_11: J11.11 U3.7 | length 2494.6
  Top Layer w10: U3.7 v1@1563.84,3725.16
  Top Layer w20: v1(1136,2962.13) 1136,2766 1197,2705 1996,2705 2043,2752 2043,2870.48 J11.11 ; v1@1563.84,3725.16 v1(1576,3713)
  Bottom Layer w20: v1(1136,2962.13) 1312,3138.13 1312,3453 1344,3485 1344,3713 1378,3747 1542,3747 v1(1576,3713)
NetJ11_12: J11.12 U3.16 | length 1376.5
  Top Layer w10: 1479,3296 1620.79,3437.79 U3.16
  Top Layer w20: 1479,3296 1479,3140 v1(1598,3021) ; v1(1689,3068) 1989,3068 v1(2054,3003)
  Bottom Layer w20: v1(1598,3021) 1642,3021 v1(1689,3068) ; v1(2054,3003) 2122,2935 2122,2878.48 2082.52,2839 J11.12
NetJ11_13: J11.13 U3.8 | length 2164.1
  Top Layer w8: v1(1413,3703.94) 1414.53,3705.47 U3.8
  Top Layer w20: v1(1400,3511) 1334,3511 1224,3401 1224,3271.99 1257.99,3238 1257.99,3168 1249.99,3160 1200,3160 1180,3140 1180,2789 1226,2743 1924,2743 1965,2784 1965,2871.22 J11.13
  Bottom Layer w20: v1(1400,3511) 1413,3524 v1(1413,3703.94)
NetJ11_14: J11.14 U3.17 | length 1244.6
  Top Layer w10: 1640.47,3411.47 U3.17
  Top Layer w20: 1640.47,3411.47 1509,3280 1509,3168 1698.38,2978.62 1934.62,2978.62 v1(1972,3016)
  Bottom Layer w20: v1(1972,3016) 2043,2945 2043,2870.48 J11.14
NetJ11_15: J11.15 U3.9 | length 1832.9
  Top Layer w10: U3.9 1547.21,3685.79 v1(1578,3655)
  Bottom Layer w20: v1(1578,3655) 1448.88,3525.88 1448.88,3481.09 1345.42,3377.62 1345.42,3124.35 1248,3026.94 1248,2843.76 1309.76,2782 1867,2782 1885,2800 1885,2872 1925.04,2902 J11.15
NetJ11_16: J11.16 U3.18 | length 1631.8
  Top Layer w8: U3.18 v1(1660.16,3630)
  Top Layer w20: v1(1775,3027) v1(1891,3027)
  Bottom Layer w20: v1(1660.16,3630) 1615,3630 1502,3517 1502,3470 1382,3350 1382,3009 1447,2944 1692,2944 v1(1775,3027) ; v1(1891,3027) 1964,2954 1964,2880 J11.16
NetJ11_17: J11.17 U3.3 | length 1887.9
  Top Layer w8: 1419,3846 1461.1,3803.9 U3.3
  Top Layer w20: v1(1264,3362) 1287.99,3338.01 1287.99,3138.74 1282,3132.75 1282,2801 1303,2780 1716.3,2780 J11.17 ; v1(1337,3765) 1337,3824 1359,3846 1419,3846
  Bottom Layer w20: v1(1264,3362) 1264,3485 1314,3535 1314,3742 v1(1337,3765)
NetJ11_18: J11.18 U3.19 | length 1328.9
  Top Layer w10: 1679.84,3388 U3.19
  Top Layer w20: 1679.84,3388 1667,3375.16 1667,3135.06 1693.06,3109 2057,3109 2094,3072 2094,2977.62 2065,2948.62 1909.04,2948.62 1886,2925.58 1886,2870.96 J11.18
NetJ88_5: J88.5 U4.17 | length 1475.9
  Top Layer w10: v2@2880,1015 2895.32,999.68 J88.5
  Top Layer w20: v1(2724,1140) 2908,1324 3687.7,1324 U4.17
  Bottom Layer w20: v1(2724,1140) 2840,1024 v2(2877,1024)
NetJ88_6: J88.6 U4.18 | length 1600.8
  Top Layer w10: v2(2692,945) 2844.76,945 2845.9,943.86 2867.73,943.86 2874.72,950.86 2874.72,972.64 J88.6
  Top Layer w20: v2(2683.98,1097) 2683.98,1184.91 2895.07,1396 3659.7,1396 U4.18
  Bottom Layer w20: v2(2683.98,1097) 2692,1088.98 v2(2692,945)
NetQ1_1: Q1.1 Q3.3 Q4.1 R1.1 | length 1910.8
  Top Layer w11.81: R1.1 v1(3070.47,4205.47) ; v1(3522,4570) Q4.1
  Top Layer w15.75: Q1.1 v2(3495.63,4450.63) ; v1(3648.06,4240) Q3.3
  Bottom Layer w20: v1(3070.47,4205.47) 3105,4240 3421.98,4240 ; v2(3495.63,4450.63) 3485,4440 3392,4440 ; v1(3522,4570) 3392,4440 ; v1(3648.06,4240) 3421.98,4240 ; 3373.98,4421.98 3392,4440 ; 3373.98,4421.98 3373.98,4440 3392,4440 ; 3373.98,4421.98 3373.98,4288 3421.98,4240
NetQ1_2: Q1.2 Q4.2 R3.1 | length 1699.7
  Top Layer w10: Q1.2 3495.63,3737.84 3515.47,3718 R3.1
  Top Layer w11.81: v1(3639,4386) 3748.2,4495.2 Q4.2
  Top Layer w15.75: 3414,4340 3461.4,4292.6 Q1.2
  Top Layer w20: 3414,4340 v1(3414,4386)
  Bottom Layer w20: v1(3414,4386) v1(3639,4386)
NetQ2_1: Q2.1 R3.2 | length 1177.6
  Top Layer w11.81: R3.2 3574.53,3247.53 v1(3575,3248)
  Bottom Layer w20: Q2.1 2750,3540 3283,3540 v1(3575,3248)
NetQ3_1: Q3.1 R4.2 R6.2 | length 1814.1
  Top Layer w11.81: 3804.53,3071.47 R4.2 3804.53,3319.53 ; R6.2 3999.53,2976
  Top Layer w15.75: Q3.1 3977.6,4277.4
  Top Layer w20: 3804.53,3071.47 3840,3036 3939.53,3036 3999.53,2976 ; 3804.53,3319.53 v1(3823,3338) ; v1(3920,3338) 3999,3417 3999,4256 3977.6,4277.4
  Bottom Layer w20: v1(3823,3338) v1(3920,3338)
NetR2_1: R2.1 R5.2 | length 2059.3
  Top Layer w11.81: v1(3285,3936) R2.1 ; R5.2 v1(4694.06,3355.94)
  Bottom Layer w20: v1(3285,3936) 4114,3936 v1(4694.06,3355.94)
NetR4_1: R4.1 U3.10 | length 6261.3
  Top Layer w8: 1280.9,3666.1 U3.10
  Top Layer w11.81: v1(3538,2966) 3721,3149 3745.47,3149 R4.1
  Top Layer w20: 1280.9,3666.1 1259,3688 1259,3891.74 1298,3930.74 1298,4629 v1(1296.53,4630.47)
  Bottom Layer w20: v1@1300,4615 1300,4625 1294.53,4630.47 1056.47,4630.47 1028,4602 1028,2816 1152,2692 2078,2692 2087.5,2701.5 2484.5,2701.5 2749,2966 v1(3538,2966)
NetR7_1: R7.1 R10.2 U2.1 | length 3643.7
  Top Layer w11.61: v1(4290,3228) 4290,3152.4 U2.1
  Top Layer w11.81: 3785.47,2736.7 R7.1
  Top Layer w20: R10.2 3262.47,4479.53 3292,4450 3292,4323 3415,4200 3415,2815 3433,2797 3769.97,2797 R7.1 ; 3785.47,2736.7 v1(3867,2655.17)
  Bottom Layer w20: v1(3867,2655.17) 4064.56,2655.17 4526.39,3117 4526.39,3181.61 4480,3228 v1(4290,3228)
NetR7_2: R7.2 R12.2 U2.4 | length 2160.2
  Top Layer w20: R12.2 2864,2864.53 v1(2991.53,2737) ; v1(3844.53,2737) R7.2 ; U2.4 4424,3077.6 v1(4486,3139.6)
  Bottom Layer w20: v1(2991.53,2737) v1(3844.53,2737) 4083.4,2737 v1(4486,3139.6)
NetR8_1: R8.1 R11.2 | length 1897.8
  Top Layer w11.81: 3357,4351 3357,4646.53 3370,4659.53 R11.2 ; R8.1 3460.47,4247.53
  Top Layer w20: 3357,4351 3460.47,4247.53
VCC: 4.2 5.2 6.2 C11.1 C12.1 J88.7 R15.2 R17.2 R18.2 U4.16 | length 4787.2
  Top Layer w10: 2205.94,973 J88.7@2855.94,973 ; 2835,1052.65 2835,1009.53 J88.7@2855.94,988.59
  Top Layer w11.81: 2090.94,1088 2090.94,1126.11 ; R18.2 2090.94,1126.11 ; R15.2 2310.47,1169.53 R17.2 2325,1134.06 2304,1113.06 2104,1113.06 2090.94,1126.11
  Top Layer w15.75: 1719.47,1216 1719.47,1135 4.2 ; 5.2 1732.44,1278.86 1779.3,1232 1864,1147.3 1864,1140 6.2 v1(1884.88,1645.12) ; 1920,1354.44 1952,1322.44 C11.1 ; 2177.56,1433.44 C12.1 R15.2
  Top Layer w20: 1719.47,1216 1735.47,1232 1779.3,1232 ; 1920,1354.44 v1(1920,1720.24) ; v1(2049,1562) 2177.56,1433.44 ; 2090.94,1088 2205.94,973 ; 2835,1052.65 3076.35,1294 3757.7,1294 U4.16
  Bottom Layer w20: v1(1884.88,1645.12) 1960,1720.24 ; v1(1920,1720.24) 1960,1720.24 ; v1(2049,1562) 2049,1692 2020.76,1720.24 1960,1720.24
pads on no net: ENC1.3 ENC1.4 J5.P1 J5.P2 J9.11 J88.P1 J88.P2 U4.10 U4.11 U4.19 U4.20

## Text inside footprints (layer, text, board x,y; h text height)
DS1: Bottom Overlay "g" at 3352.52,2045 h30; Bottom Overlay "p" at 3197.52,1855 h30; Bottom Overlay "b" at 3287.52,2095 h30; Bottom Overlay "e" at 3417.52,1885 h30; Bottom Overlay "c" at 3287.52,1890 h30; Bottom Overlay "d" at 3352.52,1825 h30; Bottom Overlay "f" at 3417.52,2090 h30; Bottom Overlay "a" at 3357.52,2175 h30
J6: Top Overlay "2" at 1069.13,3517.99 h31.5; Top Overlay "1" at 1080.94,3435.32 h31.5
J7: Top Overlay "2" at 1250.39,2907.99 h31.5; Top Overlay "1" at 1262.2,2825.32 h31.5
J8: Top Overlay "2" at 1069.76,3183.62 h31.5; Top Overlay "1" at 1081.57,3100.95 h31.5
J9: Top Overlay "1" at 2008.78,3284.06 h31.5 r180; Top Overlay "2" at 2020.59,3201.38 h31.5 r180
J10: Top Overlay "2" at 3051.38,3037.52 h31.5 r90; Top Overlay "1" at 3134.05,3049.33 h31.5 r90
J11: Top Overlay "1" at 2543.15,2929.69 h31.5 r180; Top Overlay "2" at 2554.96,2847.01 h31.5 r180